# Altium PCB Battery Monitor.PcbDoc
Units mm, origin at the board's own origin, x right, y up, seen from the top; angles counter-clockwise.
Board outline 89.32 x 76.18 mm, 2 copper layers (Top Layer, Bottom Layer); 18 components, 16 nets, 58 pads, 0 vias.
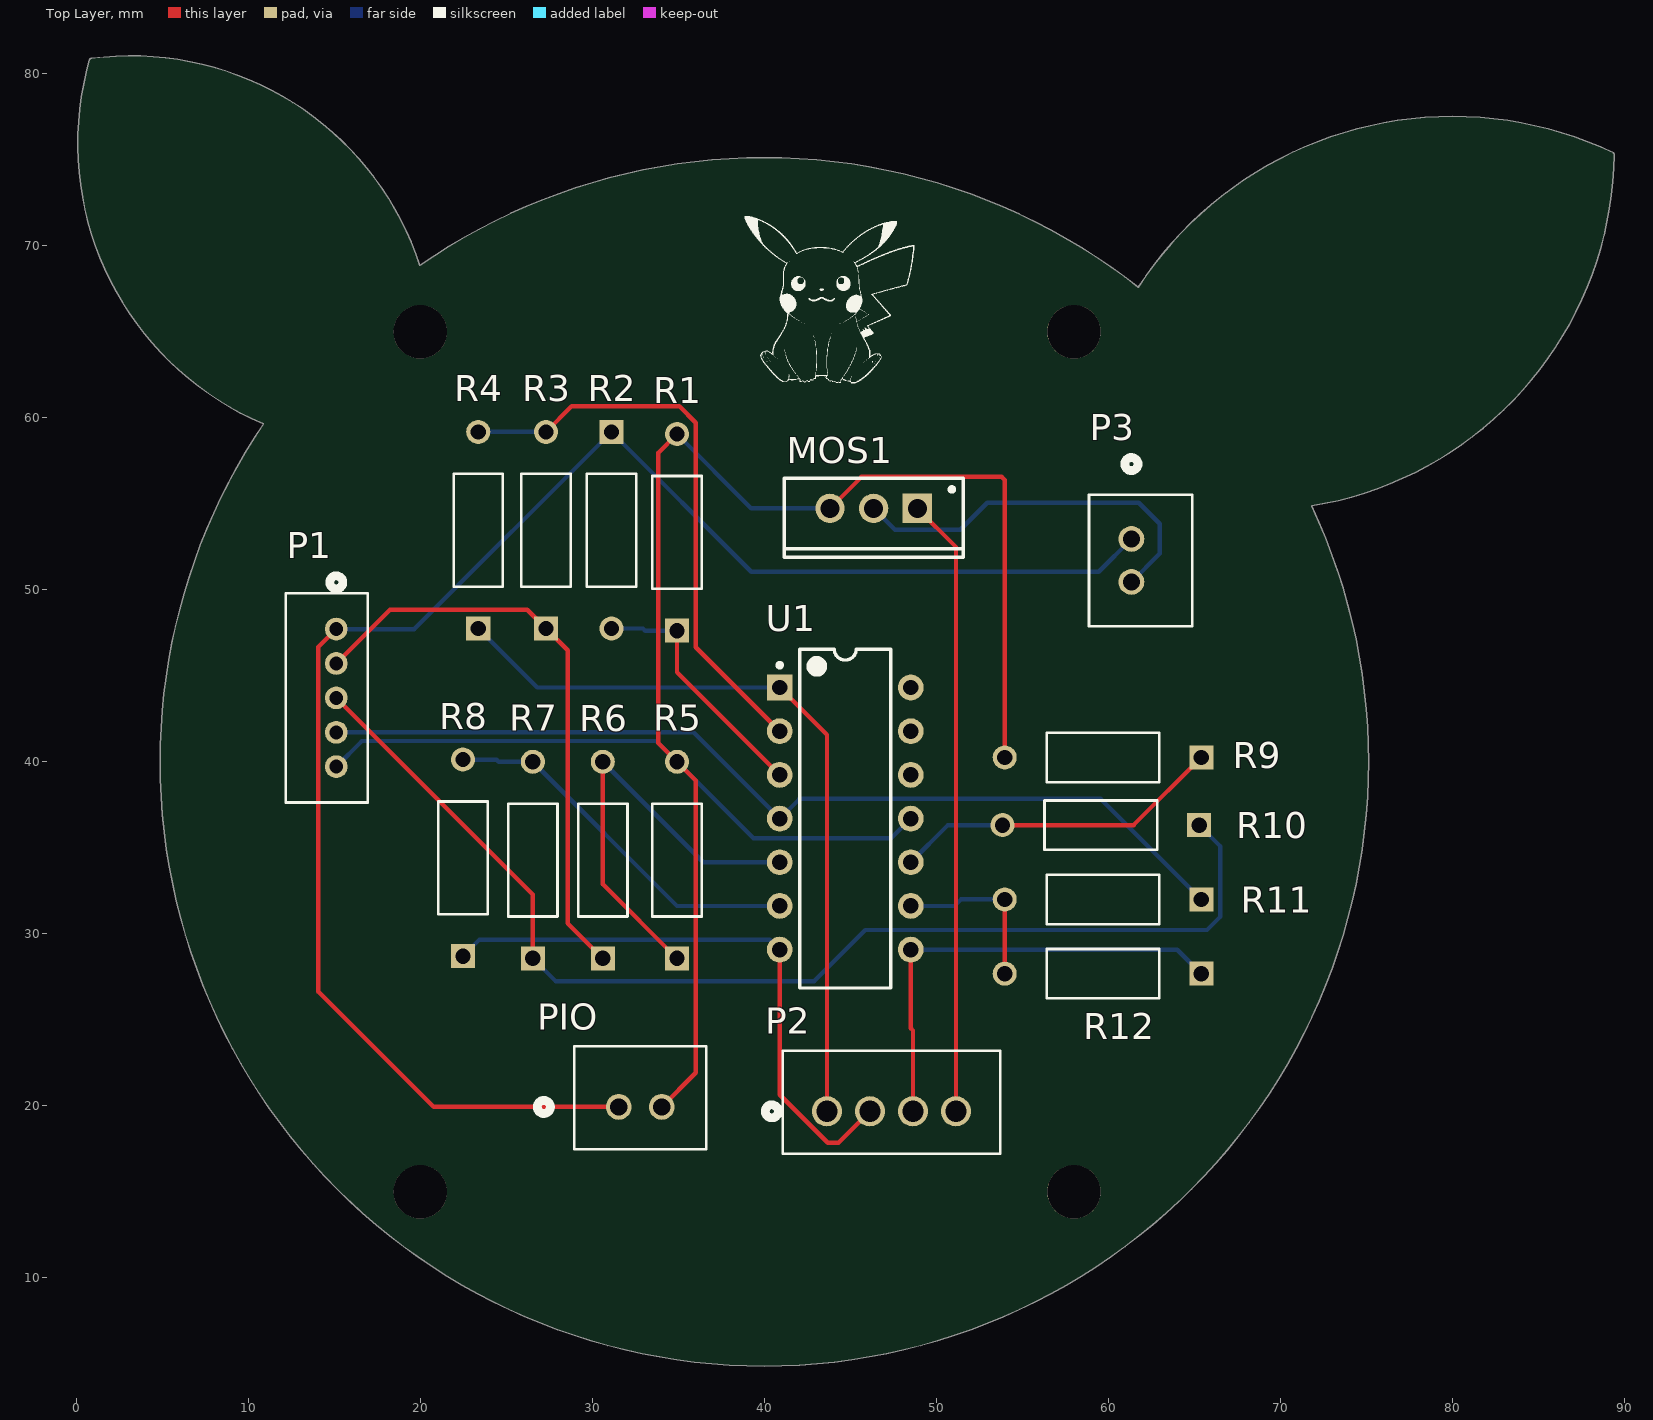
[diagram p0: Top Layer view]
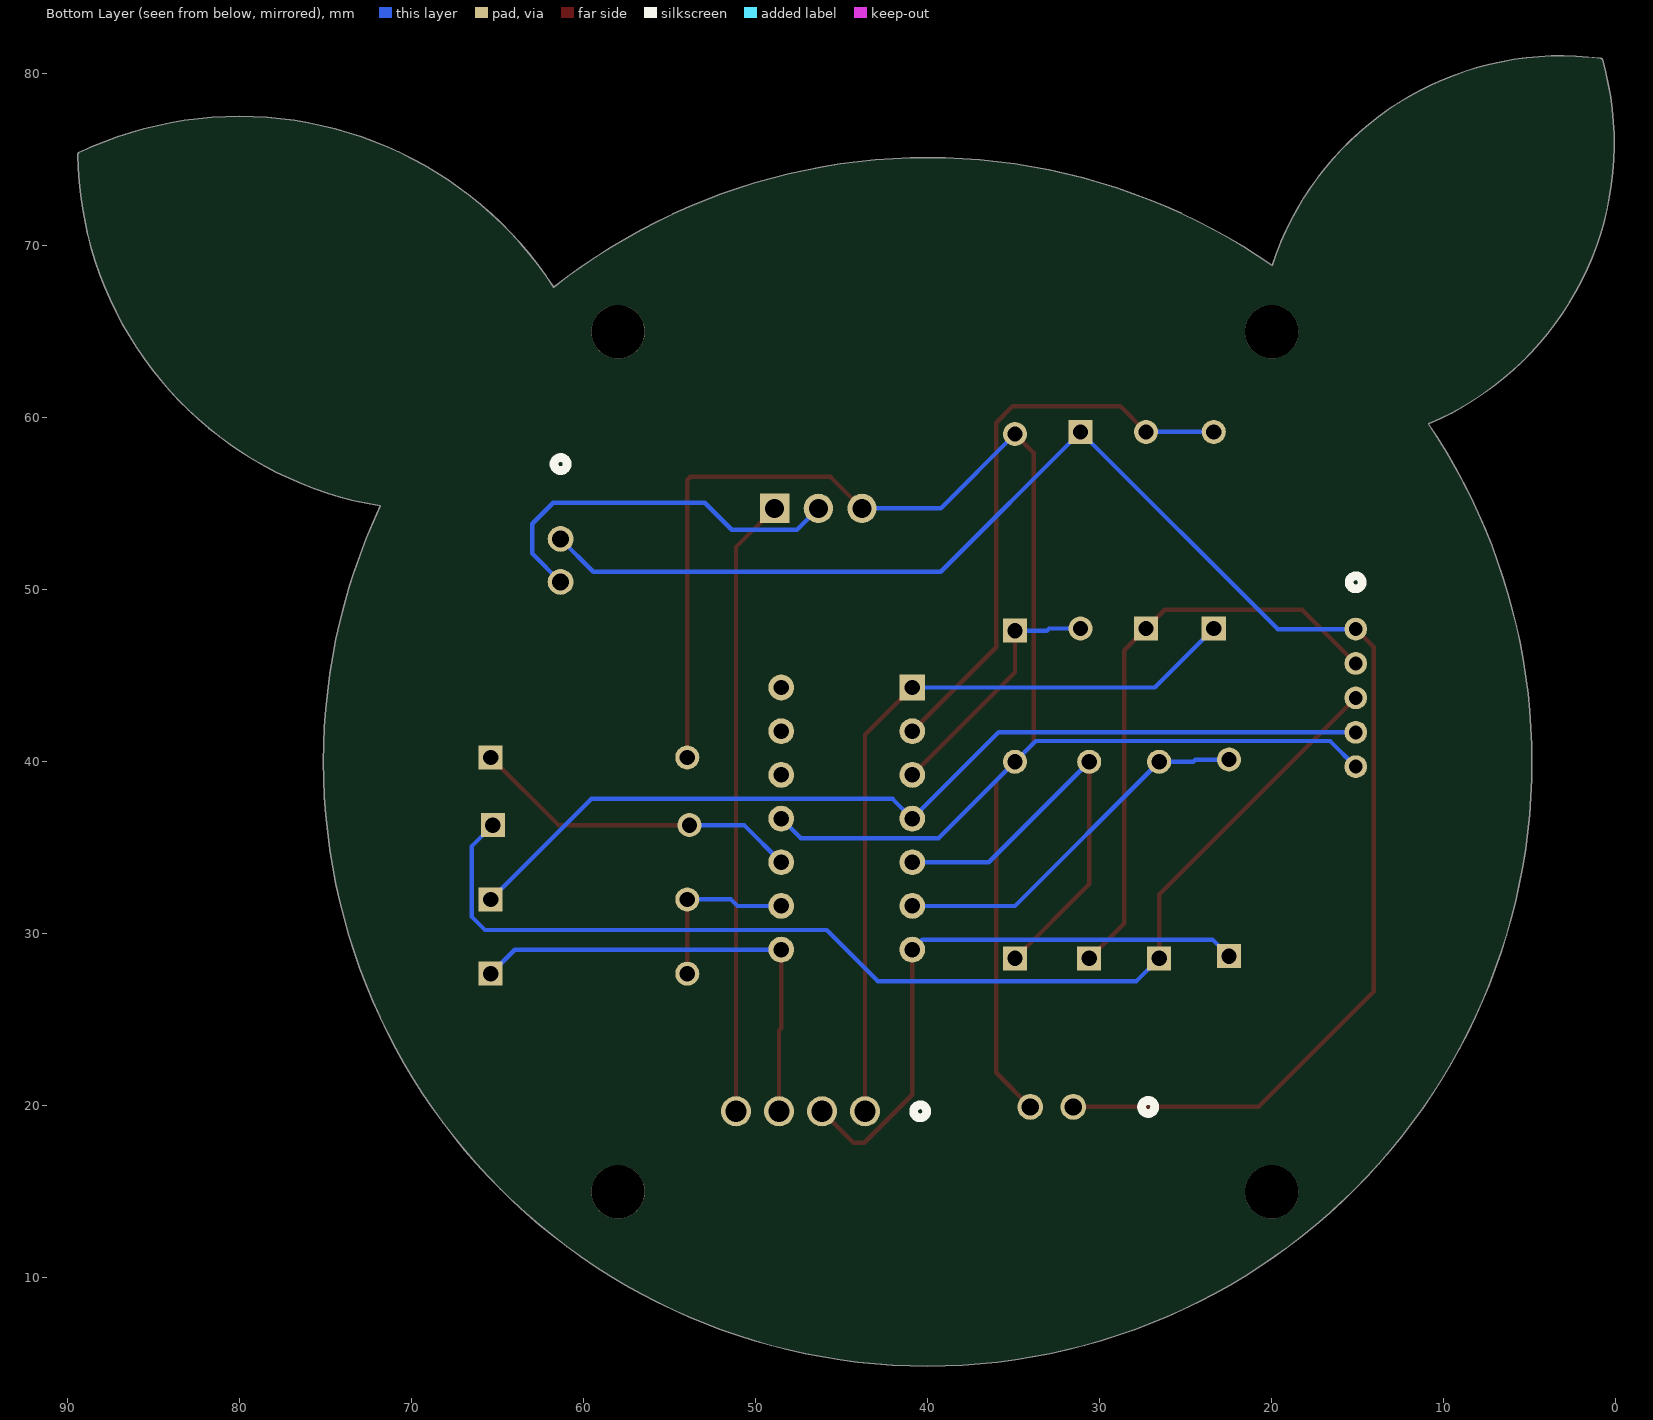
[diagram p1: Bottom Layer view, seen from below]
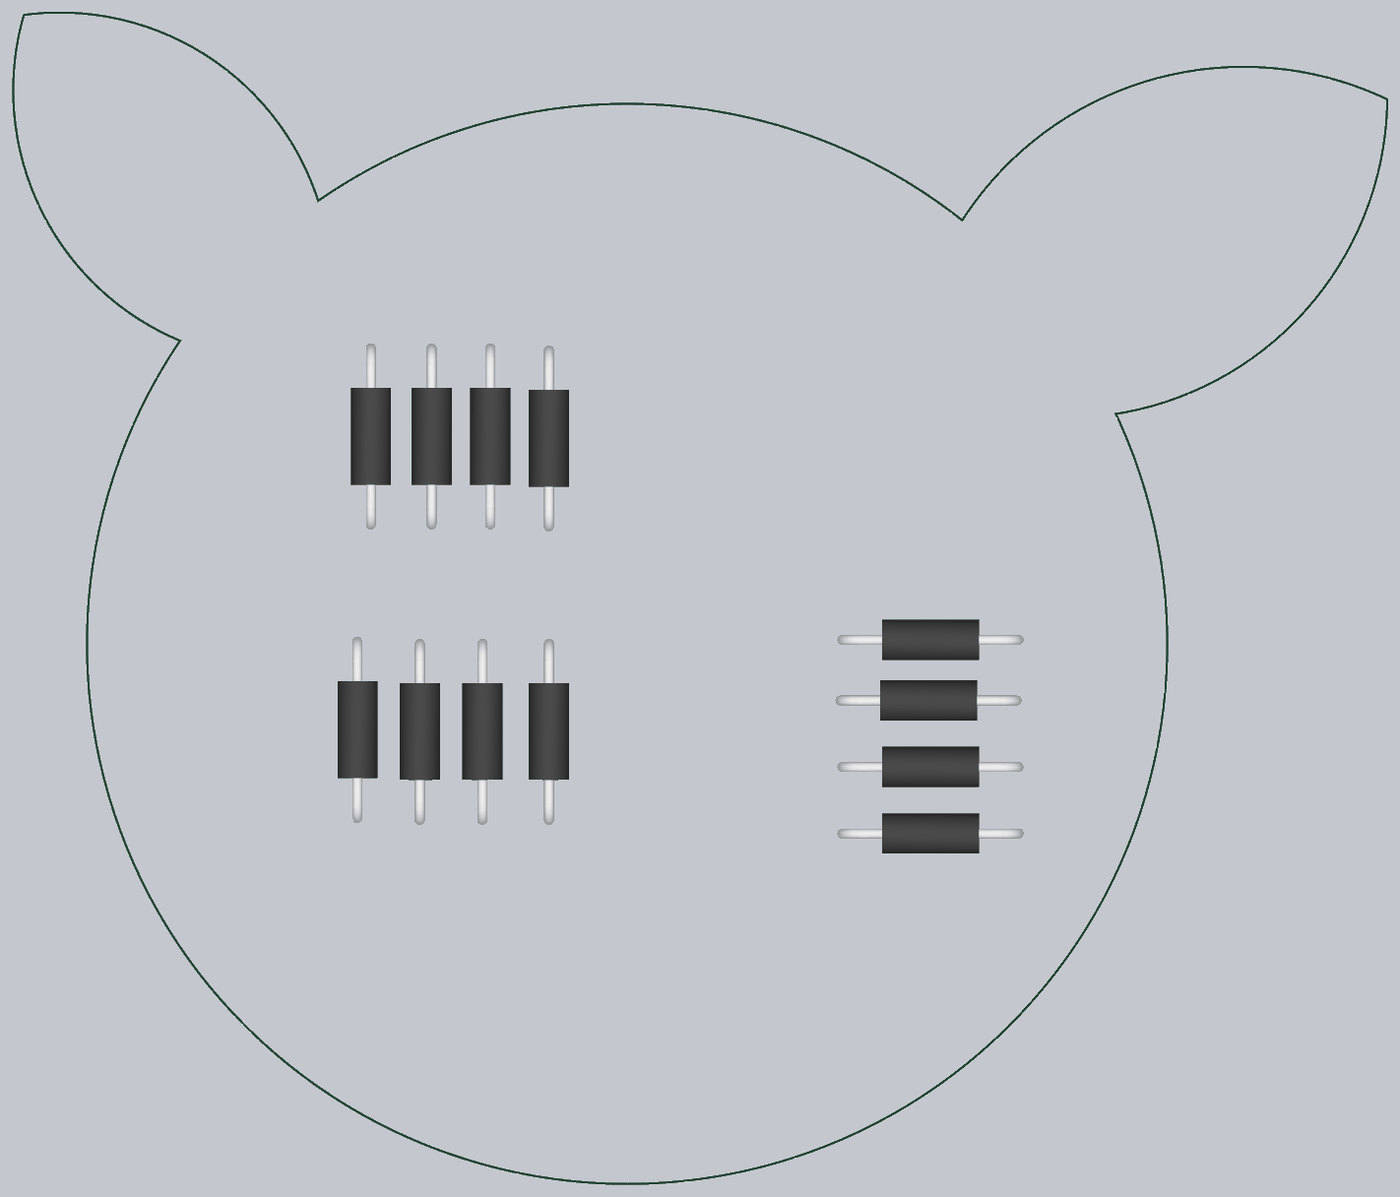
[diagram p2: 3D render of the assembled board from above, using the file's embedded part models]

## Layer stack, top to bottom
Top Solder: solder mask 0.0102, Solder Resist, Dk 3.5
Top Layer: signal copper 0.0356
Dielectric 1: dielectric 0.32, FR-4, Dk 4.8
Bottom Layer: signal copper 0.0356
Bottom Solder: solder mask 0.0102, Solder Resist, Dk 3.5

## Board outline
10.884,59.651 cw(c17.78,75.946) 0.767,80.807 cw(c0.889,80.772) 0.872,80.898 cw(c3.175,63.373) 19.977,68.862 cw(c40,40) 40,75.127 cw(c40,40) 61.739,67.592 cw(c80.01,55.753) 89.336,75.426 cw(c89.281,75.311) 89.408,75.311 89.408,75.309 cw(c68.453,75.565) 71.82,54.88 cw(c40,40) 75.127,40 cw(c40,40) 40,4.873 cw(c40,40) 4.873,40 cw(c40,40)

## Design rules (kind name [scope] priority, off if disabled: settings)
Clearance [All] p1: gap=0.254 ignorepadtopadclearanceinfootprint=FALSE
PolygonConnect [All] p1: connectstyle=Relief reliefconductorwidth=0.254 reliefentries=4 polygonreliefangle="90 Angle" airgapwidth=0.254
RoutingVias [All] p1: holewidth=0.711 width=1.27 viastyle="Through Hole" minholewidth=0.711 minwidth=1.27 maxholewidth=0.711 maxwidth=1.27
SolderMaskExpansion [All] p1: expansion=0.102 istentingtop=FALSE
Width [All] p1: maxlimit=0.254 minlimit=0.254 preferedwidth=0.254
30 further rules are at their usual default settings.

## Components (designator, comment, footprint, x,y, rotation, side; value= is the part's Value field where it differs from the comment)
MOS1 "IRF540ZPBF" TO220 46.355,54.737 r180 top
P1 "Connector" CONN_B5B-PH-K-SLFSN_JST 15.113,47.72 r90 top
P2 "Connector" CONN_B4B-XH-A_JST 43.641,19.685 r0 top
P3 "Connector" CONN_B2B-XH-A_JST 61.341,52.959 r270 top
PIO "Connector" CONN_B2B-XH-A_JST 31.536,19.939 r0 top
R1 "1k" STA_CF14_STP 34.925,47.625 r90 top value=1kR
R2 "2k" STA_CF14_STP 31.115,59.182 r270 top value=1kR
R3 "2k" STA_CF14_STP 27.305,47.752 r90 top value=1kR
R4 "1k" STA_CF14_STP 23.368,47.752 r90 top value=1kR
R5 "1k" STA_CF14_STP 34.925,28.575 r90 top value=1kR
R6 "2k" STA_CF14_STP 30.607,28.575 r90 top value=1kR
R7 "2k" STA_CF14_STP 26.543,28.575 r90 top value=1kR
R8 "1k" STA_CF14_STP 22.479,28.702 r90 top value=1kR
R9 "1k" STA_CF14_STP 65.405,40.259 r180 top value=1kR
R10 "2k" STA_CF14_STP 65.278,36.322 r180 top value=1kR
R11 "2k" STA_CF14_STP 65.405,32.004 r180 top value=1kR
R12 "1k" STA_CF14_STP 65.405,27.686 r180 top value=1kR
U1 "LM324N" N0014A 44.704,36.703 r0 top

## Footprints (in the part's own frame and the unit in brackets; to place one, negate y for a bottom-side part, rotate by r counter-clockwise, add the part's x,y. Pads: shape width x height; smd on the part's side, far side on the other; paste and mask are expansions set on the pad)
CONN_B2B-XH-A_JST [mil]
  round 59 / inner round 60 / far side round 59 hole 39 paste-99999 mask+0: 1(0,0) 2(98.43,0)
  silkscreen extent -186,-97 200,139
CONN_B4B-XH-A_JST [mil]
  round 69 / inner round 60 / far side round 69 hole 49 paste-99999 mask+0: 1(0,0) 2(98.42,0) 3(196.85,0) 4(295.28,0)
  silkscreen extent -141,-97 397,139
CONN_B5B-PH-K-SLFSN_JST [mil]
  round 52 / inner round 60 / far side round 52 hole 32 paste-99999 mask+0: 1(0,0) 2(-78.74,0) 3(-157.48,0) 4(-236.22,0) 5(-314.96,0)
  silkscreen extent -397,-72 122,115
N0014A [mm] "DIP, 14-Leads, Body 19.7x6.6mm, Pitch 2.54mm"
  rect 1.5x1.5 hole 0.9: 1(-3.81,7.62)
  round 1.5 hole 0.9: 2(-3.81,5.08) 3(-3.81,2.54) 4(-3.81,0) 5(-3.81,-2.54) 6(-3.81,-5.08) 7(-3.81,-7.62) 8(3.81,-7.62) 9(3.81,-5.08) 10(3.81,-2.54) 11(3.81,0) 12(3.81,2.54) 13(3.81,5.08) 14(3.81,7.62)
  silkscreen extent -3.93,-9.85 2.65,9.85, body extent -3.95,-9.85 3.95,9.85, height 5.08
STA_CF14_STP [mil]
  rect 55x55 / inner round 60 / far side rect 55x55 hole 35 paste-99999 mask+0: 1(0,0)
  round 55 / inner round 60 / far side round 55 hole 35 paste-99999 mask+0: 2(450,0)
  silkscreen extent 96,-56 354,57, body extent -12,-51 462,51, height 103
TO220 [mm] "TO, Thru-Hole, Vertical, Heatsink Mounted; 3 In-Line Leads; Pitch 2.54 mm"
  rect 1.7x1.7 hole 1.1: 1(-2.54,0)
  round 1.7 hole 1.1: 2(0,0) 3(2.54,0)
  silkscreen extent -5.2,-1.75 5.2,2.85, body extent -5.25,-1.8 5.25,2.9, height 19.7

## Part data
MOS1: "Power Field-Effect Transistor, 36A I(D), 100V, 0.0265ohm, 1-Element, N-Channel, Silicon, Metal-oxide Semiconductor FET, TO-220AB", Avalanche Energy Rating (Eas)=120mJ, Case Connection=DRAIN, Drain Current-Max (Abs) (ID)=34A, Drain Current-Max (ID)=36A, Drain-source On Resistance-Max=26.5mR, DS Breakdown Voltage-Min=100V, Manufacturer=Infineon, Max Operating Temperature=175°C, Operating Mode="ENHANCEMENT MODE", Package Body Material=Plastic, Package Shape=Rectangular, Package Style="FLANGE MOUNTMeter", Peak Reflow Temperature (Cel)=250°C, Power Dissipation-Max (Abs)=91W, Pulsed Drain Current-Max (IDM)=140A, Supplier Part Number=IRF540ZPBF-ND, Time @ Peak Reflow Temperature-Max (s)=30s, Category=MOSFETs, ComponentLink1Description=https://datasheet.ciiva.com:443/pdfs/VipMasterIC/IC/IRSD/IRSDS18787/IRSDS18787-1.pdf?src-supplier=IHS+Markit, ComponentLink1URL=https://datasheet.ciiva.com:443/pdfs/VipMasterIC/IC/IRSD/IRSDS18787/IRSDS18787-1.pdf?src-supplier=IHS+Markit, ComponentLink2Description=http://www.farnell.com/datasheets/695950.pdf?src-supplier=Farnell, ComponentLink2URL=http://www.farnell.com/datasheets/695950.pdf?src-supplier=Farnell, ComponentLink3Description=https://www.alliedelec.com/m/d/9b69e5f77608fdb1ac970df3f21c25ae.pdf?src-supplier=Allied+Electronics, ComponentLink3URL=https://www.alliedelec.com/m/d/9b69e5f77608fdb1ac970df3f21c25ae.pdf?src-supplier=Allied+Electronics, ComponentLink4Description=http://www.irf.com/product-info/datasheets/data/irf540z.pdf?src-supplier=Digikey, ComponentLink4URL=http://www.irf.com/product-info/datasheets/data/irf540z.pdf?src-supplier=Digikey, ComponentLink5Description=http://datasheet.octopart.com/IRF540ZPBF-Infineon-datasheet-10898051.pdf?src-supplier=Avnet, ComponentLink5URL=http://datasheet.octopart.com/IRF540ZPBF-Infineon-datasheet-10898051.pdf?src-supplier=Avnet, ComponentLink6Description=https://datasheet.octopart.com/IRF540Z-International-Rectifier-datasheet-4648.pdf?src-supplier=Newark, ComponentLink6URL=https://datasheet.octopart.com/IRF540Z-International-Rectifier-datasheet-4648.pdf?src-supplier=Newark, ComponentLink7Description=https://datasheet.octopart.com/IRF540ZPBF-Infineon-datasheet-8102946.pdf?src-supplier=Element14, ComponentLink7URL=https://datasheet.octopart.com/IRF540ZPBF-Infineon-datasheet-8102946.pdf?src-supplier=Element14, ComponentLink8Description=http://datasheet.octopart.com/IRF540ZPBF-Infineon-datasheet-10898051.pdf?src-supplier=Rs, ComponentLink8URL=http://datasheet.octopart.com/IRF540ZPBF-Infineon-datasheet-10898051.pdf?src-supplier=Rs, ComponentLink9Description=http://datasheet.octopart.com/IRF540ZPBF-Infineon-datasheet-10898051.pdf?src-supplier=Mouser, ComponentLink9URL=http://datasheet.octopart.com/IRF540ZPBF-Infineon-datasheet-10898051.pdf?src-supplier=Mouser, ComponentLink10Description=http://datasheet.octopart.com/IRF540ZPBF-Infineon-datasheet-10898051.pdf?src-supplier=Future+Electronics, ComponentLink10URL=http://datasheet.octopart.com/IRF540ZPBF-Infineon-datasheet-10898051.pdf?src-supplier=Future+Electronics, ComponentLink11Description=http://datasheet.octopart.com/IRF540ZPBF-Infineon-datasheet-10898051.pdf?src-supplier=TME, ComponentLink11URL=http://datasheet.octopart.com/IRF540ZPBF-Infineon-datasheet-10898051.pdf?src-supplier=TME, ComponentLink12Description=http://datasheet.octopart.com/IRF540ZPBF-Infineon-datasheet-10898051.pdf?src-supplier=Quest, ComponentLink12URL=http://datasheet.octopart.com/IRF540ZPBF-Infineon-datasheet-10898051.pdf?src-supplier=Quest, FET Technology="METAL-OXIDE SEMICONDUCTOR", JEDEC-95 Code=TO-220AB, JESD-30 Code=R-PSFM-T3, JESD-609 Code=e3, Manufacturer Part Number=IRF540ZPBF, Number of Elements=1, Pins=3, Polarity/Channel Type=N-CHANNEL, Pricing="1=1.22, 50=0.9822, 100=0.7784, 500=0.6598, 1000=0.53747, 2000=0.50597, 5000=0.48187, 10000=0.45963 (USD)", Qualification Status="Not Qualified", Reach SVHC Compliant=Yes, RoHS=Yes, RoHS Compliant=Yes, Stock=39079, Supplier=Digikey, Surface Mount=No, Terminal Finish=Tin, Terminal Form="Through Hole", Terminal Position=SINGLE, Transistor Application=SWITCHING, Transistor Element Material=SILICON
P1: library part B5B-PH-K-S, "CONN HEADER VERT 5POS 2MM", Manufacturer=JST, Supplier Part Number=455-1707-ND, Category=Connectors, ComponentLink1Description=https://datasheet.ciiva.com/6905/phseries-6905849.pdf?src-supplier=Digikey, ComponentLink1URL=https://datasheet.ciiva.com/6905/phseries-6905849.pdf?src-supplier=Digikey, Manufacturer Part Number=B5B-PH-K-S, Pricing="1=0.31, 10=0.268, 100=0.2084, 500=0.1786, 1000=0.14883, 5000=0.12757, 10000=0.11906 (USD)", RoHS=Yes, Stock=427072, Supplier=Digikey
P2: library part B4B-XH-A, "Header B4B-XH-A, 2.50mm, 4-contacts, top entry, THT /500/box", Manufacturer=JST, Supplier Part Number=455-B4B-XH-A-ND, Category="FFC / FPC", ComponentLink1Description=https://datasheet.ciiva.com/14155/xh-series-eng-tds-14155433.pdf?src-supplier=Distrelec, ComponentLink1URL=https://datasheet.ciiva.com/14155/xh-series-eng-tds-14155433.pdf?src-supplier=Distrelec, Manufacturer Part Number=B4B-XH-A, Pricing="1=0.23, 10=0.19, 100=0.1465, 500=0.12392, 1000=0.10139, 5000=0.09013, 10000=0.08168 (USD)", RoHS=Yes, Stock=324702, Supplier=Digikey
P3 PIO: library part B2B-XH-A, "Header B2B-XH-A, 2.50mm, 2-contacts, top entry, THT /1000/box", Manufacturer=JST, Supplier Part Number=455-B2B-XH-A-ND, Category="FFC / FPC", ComponentLink1Description=https://www.distrelec.biz/Web/Downloads/_t/ds/xh-series_eng_tds.pdf?mime=application%2Fpdf&src-supplier=Distrelec, ComponentLink1URL=https://www.distrelec.biz/Web/Downloads/_t/ds/xh-series_eng_tds.pdf?mime=application%2Fpdf&src-supplier=Distrelec, Manufacturer Part Number=B2B-XH-A, Pricing="1=0.15, 10=0.122, 100=0.0898, 500=0.07432, 1000=0.06502, 5000=0.05573, 10000=0.05419 (USD)", RoHS=Yes, Stock=990478, Supplier=Digikey
R1 R2 R3 R4 R5 R6 R7 R8 R9 R10 R11 R12: library part CF14JT1K00, "Fixed Resistor, Carbon Film, 0.25W, 1000ohm, 350V, 5% +/-Tol, -400,0ppm/Cel, Through Hole Mount", Manufacturer="Stackpole Electronics", Max Operating Temperature=155°C, Min Operating Temperature=-55°C, Package Diameter=2.3mm, Package Length=6mm, Package Shape=Tubular, Package Style=AxialMeter, Power=250mW, Rated Temperature=70°C, Resistor Type="FIXED RESISTOR", Supplier Part Number=CF14JT1K00CT-ND, Temperature Coefficient=400ppm/°C, Tolerance=5%, Working Voltage=350V, Category="Through-Hole Resistors", ComponentLink1Description=https://datasheet.ciiva.com:443/pdfs/VipMasterIC/IC/SEIE/SEIE-S-A0009883960/SEIE-S-A0009883960-1.pdf?src-supplier=IHS+Markit, ComponentLink1URL=https://datasheet.ciiva.com:443/pdfs/VipMasterIC/IC/SEIE/SEIE-S-A0009883960/SEIE-S-A0009883960-1.pdf?src-supplier=IHS+Markit, ComponentLink2Description=https://www.seielect.com/catalog/SEI-Packaging.pdf?src-supplier=Digikey, ComponentLink2URL=https://www.seielect.com/catalog/SEI-Packaging.pdf?src-supplier=Digikey, ComponentLink3Description=https://www.seielect.com/Catalog/SEI-CF_CFM.pdf?src-supplier=Digikey, ComponentLink3URL=https://www.seielect.com/Catalog/SEI-CF_CFM.pdf?src-supplier=Digikey, ComponentLink4Description=http://www.seielect.com/Catalog/SEI-CF_CFM.pdf?src-supplier=Future+Electronics, ComponentLink4URL=http://www.seielect.com/Catalog/SEI-CF_CFM.pdf?src-supplier=Future+Electronics, ComponentLink5Description=https://www.seielect.com/catalog/SEI-CF_CFM.pdf?src-supplier=Avnet, ComponentLink5URL=https://www.seielect.com/catalog/SEI-CF_CFM.pdf?src-supplier=Avnet, ComponentLink6Description=http://components.arrow.com/part/dataview/27620077S9848643N1174?src-supplier=Arrow+Electronics, ComponentLink6URL=http://components.arrow.com/part/dataview/27620077S9848643N1174?src-supplier=Arrow+Electronics, ComponentLink7Description=https://www.verical.com/server-webapp/html/getDatasheet?partID=360403&src-supplier=Verical, ComponentLink7URL=https://www.verical.com/server-webapp/html/getDatasheet?partID=360403&src-supplier=Verical, Construction=Tubular, JESD-609 Code=e3, Lead Diameter=0.55mm, Lead Length=28mm, Manufacturer Part Number=CF14JT1K00, Mounting Technology="Through Hole", Packaging="Tape and Reel", Pins=2, Pricing="1=0.1, 10=0.053, 25=0.0404, 50=0.0308, 100=0.0215, 250=0.01728, 500=0.01382, 1000=0.01017 (USD)", Reach SVHC Compliant=Yes, RoHS=Yes, RoHS Compliant=Yes, Stock=1012460, Supplier=Digikey, Technology="CARBON FILM", Terminal Finish=Tin, Termination=Wire
U1: "Operational Amplifier, 4 Func, 9000uV Offset-Max, BIPolar, PDIP14", Average Bias Current-Max (IIB)=500nA, Bias Current-Max (IIB) @25C=250nA, Case/Package=DIP, Frequency Compensation=YES, Input Offset Voltage-Max=9mV, Manufacturer="Texas Instruments", Max Operating Temperature=70°C, Max Supply Current=1.2mA, Micropower=Yes, Min Operating Temperature=0°C, Neg Supply Voltage Limit-Max=0V, Nominal Supply Voltage=5V, Package Body Material=Plastic, Package Equivalence Code=DIP14,.3, Package Shape=Rectangular, Package Style=IN-LINEMeter, Peak Reflow Temperature (Cel)=260°C, Power Supplies=5/30V, Supplier Part Number=296-1391-5-ND, Supply Voltage Limit-Max=32V, Temperature Grade=COMMERCIAL, Time @ Peak Reflow Temperature-Max (s)=40s, Voltage Gain-Min=25000, Amplifier Type="OPERATIONAL AMPLIFIER", Architecture=VOLTAGE-FEEDBACK, Category="Amplifiers - Op Amps, Buffer, Instrumentation", Channels=4, Common Mode Rejection Ratio-Min=65dB, Common-mode Reject Ratio-Nom=85dB, ComponentLink1Description=https://datasheet.ciiva.com:443/pdfs/VipMasterIC/IC/NATL/NATLS09708/NATLS09708-1.pdf?src-supplier=IHS+Markit, ComponentLink1URL=https://datasheet.ciiva.com:443/pdfs/VipMasterIC/IC/NATL/NATLS09708/NATLS09708-1.pdf?src-supplier=IHS+Markit, ComponentLink2Description=https://datasheet.ciiva.com/5997/1768103-5997424.pdf?src-supplier=Farnell, ComponentLink2URL=https://datasheet.ciiva.com/5997/1768103-5997424.pdf?src-supplier=Farnell, ComponentLink3Description=https://datasheet.ciiva.com/1796/lm224-1796723.pdf?src-supplier=Digikey, ComponentLink3URL=https://datasheet.ciiva.com/1796/lm224-1796723.pdf?src-supplier=Digikey, ComponentLink4Description=https://datasheet.ciiva.com/7148/lm224-7148869.pdf?src-supplier=Newark, ComponentLink4URL=https://datasheet.ciiva.com/7148/lm224-7148869.pdf?src-supplier=Newark, ComponentLink5Description=https://datasheet.ciiva.com/7709/1840878-7709815.pdf?src-supplier=Element14, ComponentLink5URL=https://datasheet.ciiva.com/7709/1840878-7709815.pdf?src-supplier=Element14, ComponentLink6Description=https://datasheet.ciiva.com/7709/1840878-7709816.pdf?src-supplier=Element14, ComponentLink6URL=https://datasheet.ciiva.com/7709/1840878-7709816.pdf?src-supplier=Element14, ComponentLink7Description=https://datasheet.ciiva.com/8008/1905671-8008853.pdf?src-supplier=Element14, ComponentLink7URL=https://datasheet.ciiva.com/8008/1905671-8008853.pdf?src-supplier=Element14, Height - Seated (Max)=5.08mm, JESD-30 Code=R-PDIP-T14, JESD-609 Code=e0, Length=19.18mm, Low-Offset=No, Manufacturer Part Number=LM324N, Neg Supply Voltage-Nom (Vsup)=0V, Pins=14, Pricing="1=0.44, 10=0.375, 25=0.35, 100=0.28, 250=0.25996, 500=0.21998, 1000=0.16998, 2500=0.15498, 5000=0.14499 (USD)", Qualification Status="Not Qualified", Reach SVHC Compliant=No, RoHS=No, RoHS Compliant=No, Slew Rate=0.5V/µs, Stock=18473, Supplier=Digikey, Surface Mount=No, Technology=BIPOLAR, Terminal Finish=Tin, Terminal Form="Through Hole", Terminal Pitch=2.54mm, Terminal Position=DUAL, Unity Gain BW-Nom=1MHz, Width=7.62mm

## Free pads (board coordinates)
  round 3.1 hole 3.1: 5(20,65) 6(58,65) 7(20,15) 8(58,15)

## Nets (pads, with @x,y where several pads share a name; then routed paths per layer and width w, separated by ;. In a path a pad name is that pad's centre, name@x,y a point inside that pad or via, vN(x,y) a via of type N, cw(c..) or ccw(c..) an arc to the next point about the centre after c; other vN are vias at no path point)
"3.7 V": P1.4 R11.1 U1.4 | length 55.3
  Bottom Layer w0.254: P1.4 35.877,41.72 U1.4 42.037,37.846 59.563,37.846 R11.1
7.4V: P1.3 R7.1 R10.1 | length 67.8
  Top Layer w0.254: P1.3 26.543,32.29 R7.1
  Bottom Layer w0.254: R7.1 27.864,27.254 42.901,27.254 45.872,30.226 65.735,30.226 66.497,30.988 66.497,35.103 R10.1
"11.1 V": P1.2 R3.1 R6.1 | length 34.5
  Top Layer w0.254: P1.2 18.237,48.844 26.213,48.844 R3.1 28.575,46.482 28.575,30.607 R6.1
"14.8 V": P1.1 P3.1 PIO.1 R2.1 | length 96.9
  Top Layer w0.254: P1.1 14.072,46.679 14.072,26.645 20.777,19.939 PIO.1
  Bottom Layer w0.254: P1.1 19.653,47.72 R2.1 39.243,51.054 59.436,51.054 P3.1
GND: MOS1.3 P1.5 PIO.2 R1.2 R5.2 R9.2 U1.11 | length 115.9
  Top Layer w0.254: PIO.2 36.017,21.92 36.017,38.913 R5.2 33.833,41.097 33.833,57.963 R1.2 ; MOS1.3 45.644,56.566 53.797,56.566 53.975,56.388 R9.2
  Bottom Layer w0.254: P1.5 16.604,41.212 33.718,41.212 R5.2 39.37,35.56 47.371,35.56 U1.11 ; R1.2 39.243,54.737 MOS1.3
NetMOS1_1: MOS1.1 P2.4 | length 36
  Top Layer w0.254: MOS1.1 51.141,52.491 P2.4
NetMOS1_2: MOS1.2 P3.2 | length 22.4
  Bottom Layer w0.254: MOS1.2 47.6,53.492 51.384,53.492 52.959,55.067 61.773,55.067 62.992,53.848 62.992,52.11 P3.2
NetP2_1: P2.1 R4.1 U1.1 | length 44.7
  Top Layer w0.254: U1.1 43.641,41.576 P2.1
  Bottom Layer w0.254: R4.1 26.797,44.323 U1.1
NetP2_2: P2.2 R8.1 U1.7 | length 34.7
  Top Layer w0.254: U1.7 40.894,20.65 43.688,17.856 44.312,17.856 P2.2
  Bottom Layer w0.254: R8.1 23.444,29.667 40.31,29.667 U1.7
NetP2_3: P2.3 R12.1 U1.8 | length 26.9
  Top Layer w0.254: U1.8 48.514,24.511 48.641,24.384 P2.3
  Bottom Layer w0.254: U1.8 64.008,29.083 R12.1
NetR1_1: R1.1 R2.2 U1.3 | length 14.7
  Top Layer w0.254: R1.1 34.925,45.212 U1.3
  Bottom Layer w0.254: R2.2 32.944,47.752 33.071,47.625 R1.1
NetR3_2: R3.2 R4.2 U1.2 | length 33.6
  Top Layer w0.254: R3.2 28.804,60.681 35.052,60.681 36.017,59.715 36.017,46.66 U1.2
  Bottom Layer w0.254: R4.2 R3.2
NetR5_1: R5.1 R6.2 U1.5 | length 25.9
  Top Layer w0.254: R6.2 30.607,32.893 R5.1
  Bottom Layer w0.254: R6.2 36.449,34.163 U1.5
NetR7_2: R7.2 R8.2 U1.6 | length 21.9
  Bottom Layer w0.254: R8.2 24.435,40.132 24.562,40.005 R7.2 34.925,31.623 U1.6
NetR9_1: R9.1 R10.2 U1.10 | length 19.4
  Top Layer w0.254: R10.2 61.468,36.322 R9.1
  Bottom Layer w0.254: U1.10 50.673,36.322 R10.2
NetR11_2: R11.2 R12.2 U1.9 | length 9.9
  Top Layer w0.254: R12.2 R11.2
  Bottom Layer w0.254: U1.9 51.054,31.623 51.435,32.004 R11.2
pads on no net: U1.12 U1.13 U1.14

## Silkscreen, mask and mechanical layers (free items; w line width, h text height)
Top Overlay:
  drawing of 8 lines, arcs and shapes, not listed
Board:
  circle w0.254: c40,40 r35
  lines w0.254: 0.889,80.772 cw(c3.175,63.373) 20.574,65.659 12.954,59.055 cw(c17.78,75.946) 0.889,80.772 ; 60.452,65.024 cw(c80.01,55.753) 89.281,75.311 cw(c68.453,75.565) 68.199,54.737 60.452,65.024